# Altium PCB LF_v5_HM10_Conn.PcbDoc
Units mil, origin at the board's own origin, x right, y up, seen from the top; angles counter-clockwise.
Board outline 405.51 x 688.98 mil, 2 copper layers (Top Layer, Bottom Layer), stack 61.855 mil thick; 2 components, 4 nets, 28 pads, 0 vias.
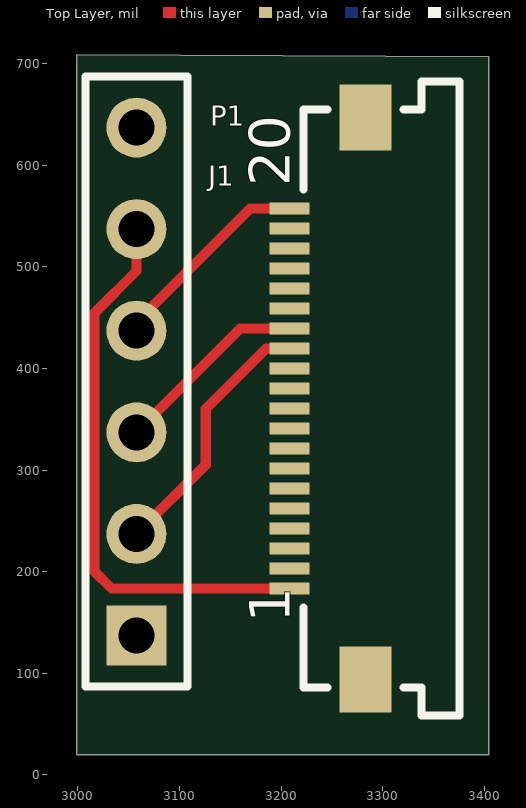
[diagram p0: Top Layer view]
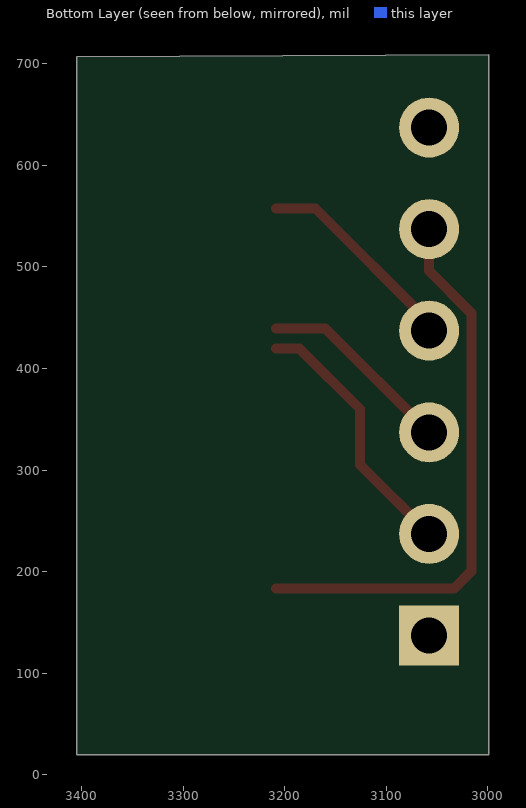
[diagram p1: Bottom Layer view, seen from below]

## Layer stack, top to bottom
Top Solder: solder mask 0.4, Solder Resist, Dk 3.5
Top Layer: signal copper 1.4
Dielectric1: core 59.0551, FR-4, Dk 4.8
Bottom Layer: signal copper 1.4
Bottom Solder: solder mask 0.4, Solder Resist, Dk 3.5

## Board outline
2999.02,19.68 2999.02,708.66 3404.53,706.69 3404.53,19.68

## Design rules (kind name [scope] priority, off if disabled: settings)
Clearance VIA-PAD [IsVIA vs IsPAD] p1: gap=6 ignorepadtopadclearanceinfootprint=FALSE except(0: Arc-Hole Track-Hole SMDPad-Hole THPad-Hole Via-Hole Fill-Hole Poly-Hole Region-Hole Text-Hole)
Clearance Clearance_REF [HasFootprint('Designator_blacking') or HasFootprint('Designator')] p2: gap=8 ignorepadtopadclearanceinfootprint=FALSE except(0: Arc-Hole Track-Hole SMDPad-Hole THPad-Hole Via-Hole Fill-Hole Poly-Hole Region-Hole Text-Hole)
Clearance Clearance_REF60 [HasFootprint('Designator_60_blacking') or HasFootprint('Designator_60')] p3: gap=15 ignorepadtopadclearanceinfootprint=FALSE except(0: Arc-Hole Track-Hole SMDPad-Hole THPad-Hole Via-Hole Fill-Hole Poly-Hole Region-Hole Text-Hole)
Clearance Clearance_28mil [HasFootprint('SFT01')] p4: gap=28 ignorepadtopadclearanceinfootprint=FALSE except(0: Arc-Hole Track-Hole SMDPad-Hole THPad-Hole Via-Hole Fill-Hole Poly-Hole Region-Hole Text-Hole)
Clearance Clearance_26mil [HasFootprint('SW-2') or HasFootprint('SW-4') or HasFootprint('SW-6') or HasFootprint('SW-8')] p5: gap=26 ignorepadtopadclearanceinfootprint=FALSE except(0: Arc-Hole Track-Hole SMDPad-Hole THPad-Hole Via-Hole Fill-Hole Poly-Hole Region-Hole Text-Hole)
Clearance Clearance_20mil [HasFootprint('NXW-02SMD') or HasFootprint('NXW-03SMD') or HasFootprint('NXW-04SMD') or HasFootprint('NXW-05SMD') or HasFootprint('NXW-06SMD') or HasFootprint('NXW-08SMD') or HasFootprint('NXW-10SMD') or HasFootprint('NXW-12SMD') or HasFootprint('GK2X5D_SMD_(PBMTD10S)')or HasFootprint('WE-PD2SA')   or HasFootprint('LK2X10E_SMD_(BHT20S)')] p6: gap=20 ignorepadtopadclearanceinfootprint=FALSE except(0: Arc-Hole Track-Hole SMDPad-Hole THPad-Hole Via-Hole Fill-Hole Poly-Hole Region-Hole Text-Hole)
Clearance Clearance_7.68mil [HasFootprint('TQFP64') vs IsPad] p7: gap=7.68 ignorepadtopadclearanceinfootprint=FALSE except(0: Arc-Hole Track-Hole SMDPad-Hole THPad-Hole Via-Hole Fill-Hole Poly-Hole Region-Hole Text-Hole)
Clearance InPolygon [InPolygon] p8: gap=15 ignorepadtopadclearanceinfootprint=FALSE except(0: Arc-Hole Track-Hole SMDPad-Hole THPad-Hole Via-Hole Fill-Hole Poly-Hole Region-Hole Text-Hole)
Clearance Keep-Out [OnLayer('Keep-Out Layer')] p9: gap=16 ignorepadtopadclearanceinfootprint=FALSE except(0: Arc-Hole Track-Hole SMDPad-Hole THPad-Hole Via-Hole Fill-Hole Poly-Hole Region-Hole Text-Hole)
Clearance RS-ZAS [InNetClass('RS_IBIS') vs InNetClass('ZAS')] p10: gap=70 ignorepadtopadclearanceinfootprint=FALSE except(0: Arc-Hole Track-Hole SMDPad-Hole THPad-Hole Via-Hole Fill-Hole Poly-Hole Region-Hole Text-Hole)
Clearance ON_GND-VT [InNet('ON_GND') vs InNet('VT')] p11: gap=70 ignorepadtopadclearanceinfootprint=FALSE except(0: Arc-Hole Track-Hole SMDPad-Hole THPad-Hole Via-Hole Fill-Hole Poly-Hole Region-Hole Text-Hole)
Clearance VT_Zasilanie [InNet('VT') vs InNetClass('ZAS')] p12: gap=70 ignorepadtopadclearanceinfootprint=FALSE except(0: Arc-Hole Track-Hole SMDPad-Hole THPad-Hole Via-Hole Fill-Hole Poly-Hole Region-Hole Text-Hole)
Clearance GND-VT [InNet('VT') vs InNet('GND')] p13: gap=70 ignorepadtopadclearanceinfootprint=FALSE except(0: Arc-Hole Track-Hole SMDPad-Hole THPad-Hole Via-Hole Fill-Hole Poly-Hole Region-Hole Text-Hole)
Clearance GND_ETH_WTÓRNA [InNetClass('ETH_WTÓRNA') vs (InNet('GND') AND InPolygon)] p14: gap=59.06 ignorepadtopadclearanceinfootprint=FALSE except(0: Arc-Hole Track-Hole SMDPad-Hole THPad-Hole Via-Hole Fill-Hole Poly-Hole Region-Hole Text-Hole)
Clearance GNT_BOTTOM [InNetClass('RS_IBIS') vs InNetClass('GND_ZAS-ON_GND')] p15: gap=70 ignorepadtopadclearanceinfootprint=FALSE except(0: Arc-Hole Track-Hole SMDPad-Hole THPad-Hole Via-Hole Fill-Hole Poly-Hole Region-Hole Text-Hole)
Clearance ON_GND-GND [InNet('ON_GND') vs InNet('GND')] p16: gap=70 ignorepadtopadclearanceinfootprint=FALSE except(0: Arc-Hole Track-Hole SMDPad-Hole THPad-Hole Via-Hole Fill-Hole Poly-Hole Region-Hole Text-Hole)
Clearance ON_GND-ALL [InNet('ON_GND')] p17: gap=15 ignorepadtopadclearanceinfootprint=FALSE except(0: Arc-Hole Track-Hole SMDPad-Hole THPad-Hole Via-Hole Fill-Hole Poly-Hole Region-Hole Text-Hole)
Clearance GND_ZAS_GND [InNet('GND_ZAS') vs InNet('GND')] p18: gap=70 ignorepadtopadclearanceinfootprint=FALSE except(0: Arc-Hole Track-Hole SMDPad-Hole THPad-Hole Via-Hole Fill-Hole Poly-Hole Region-Hole Text-Hole)
Clearance GND_ZAS-ALL [InNet('GND_ZAS')] p19: gap=15 ignorepadtopadclearanceinfootprint=FALSE except(0: Arc-Hole Track-Hole SMDPad-Hole THPad-Hole Via-Hole Fill-Hole Poly-Hole Region-Hole Text-Hole)
Clearance 3.3V-ALL [InNetClass('3.3V_L2_1')] p20: gap=20 ignorepadtopadclearanceinfootprint=FALSE except(0: Arc-Hole Track-Hole SMDPad-Hole THPad-Hole Via-Hole Fill-Hole Poly-Hole Region-Hole Text-Hole)
Clearance Clearance_1 [isvia vs isvia] p21: gap=12 ignorepadtopadclearanceinfootprint=FALSE except(0: Arc-Hole Track-Hole SMDPad-Hole THPad-Hole Via-Hole Fill-Hole Poly-Hole Region-Hole Text-Hole)
Clearance "raster 0.5mm" [(InPadClass('Pady 0.5mm')) vs IsTrack  Or IsPad] p22: gap=7.6 ignorepadtopadclearanceinfootprint=FALSE except(0: Arc-Hole Track-Hole SMDPad-Hole THPad-Hole Via-Hole Fill-Hole Poly-Hole Region-Hole Text-Hole)
Clearance Clearance_2 [All] p23: gap=7 ignorepadtopadclearanceinfootprint=FALSE except(0: Arc-Hole Track-Hole SMDPad-Hole THPad-Hole Via-Hole Fill-Hole Poly-Hole Region-Hole Text-Hole)
ComponentClearance [All] p1: gap=0 collisioncheckmode=3 verticalgap=0 showdistances=FALSE
HoleSize HoleSize_Ramka [HasFootprint('hole_frame') or HasFootprint('hole_frame1')] p1: absolutevalues=TRUE maxlimit=118.11 minlimit=118.11 maxpercent=80.000 minpercent=20.000
HoleSize [All] p2: absolutevalues=TRUE maxlimit=125.98 minlimit=12 maxpercent=80.000 minpercent=20.000
MinimumSolderMaskSliver MinimumSolderMaskSliver_Ramka [HasFootprint('LOGO-05X18_so')] p1: minsoldermaskwidth=0
MinimumSolderMaskSliver MinimumSolderMaskSliver_Via-Pad [IsVia vs IsPad] p2: minsoldermaskwidth=20
MinimumSolderMaskSliver [All] p3: minsoldermaskwidth=5.5
PolygonConnect PolygonConnect_EP [HasFootprintPad( 'TO-263_T&B',2) vs OnBottomLayer or OnTopLayer] p1: connectstyle=Direct reliefconductorwidth=10 reliefentries=4 polygonreliefangle="90 Angle" airgapwidth=10
PolygonConnect PolygonConnect_VIA [ISVIA] p2: connectstyle=Direct reliefconductorwidth=10 reliefentries=4 polygonreliefangle="90 Angle" airgapwidth=10
PolygonConnect PolygonConnect_30mil [HasFootprint('CE-SMD-J80_(H7,9MM)')] p3: connectstyle=Relief reliefconductorwidth=30 reliefentries=4 polygonreliefangle="90 Angle" airgapwidth=10
PolygonConnect PolygonConnect_24mil [HasFootprint('3528-SMDB') or HasFootprint('6032-SMDC') or HasFootprint('7343-SMDD')] p4: connectstyle=Relief reliefconductorwidth=24 reliefentries=4 polygonreliefangle="90 Angle" airgapwidth=10
PolygonConnect PolygonConnect_20mil [HasFootprint('0805R') or HasFootprint('0805C')or HasFootprint('1206R') or HasFootprint('1206C')] p5: connectstyle=Relief reliefconductorwidth=20 reliefentries=4 polygonreliefangle="90 Angle" airgapwidth=10
PolygonConnect PolygonConnect_16mil [HasFootprint('CF2040_V_(ZIF40-0,5MM)')] p6: connectstyle=Relief reliefconductorwidth=16 reliefentries=4 polygonreliefangle="90 Angle" airgapwidth=10
PolygonConnect PolygonConnect_14mil [HasFootprint('SOODIM-200_(TYCO,CONCRAFT 2,5V)') or HasFootprint('SOODIM-200_(TYCO,CONCRAFT 2,5V) - COLIBRI') or HasFootprint('TSSOP24') or HasFootprint('TSSOP20') or HasFootprint('TSSOP18') or HasFootprint('TSSOP16') or HasFootprint('TSSOP14') or HasFootprint('SSOP24-150-0.64') or HasFootprint('SOT-323-5')] p7: connectstyle=Relief reliefconductorwidth=14 reliefentries=4 polygonreliefangle="90 Angle" airgapwidth=10
PolygonConnect PolygonConnect_12mil [HasFootprint('CF2014_D_(ZIF14-0,5MM)') or HasFootprint('CF2040_U_(ODWROTNA NUMERACJA)') or HasFootprint('TQFP144') or HasFootprint('TQFP80') or HasFootprint('TQFP64') or HasFootprint('TQFP48') or HasFootprint('0603C') or HasFootprint('0603R') or HasFootprint('SOT-23-3') or HasFootprint('4D03')or HasFootprint('QFN16-0.65_(H1,6MM)')or HasFootprint('PLCC2') or HasFootprint('PLCC2-S')or HasFootprint('SFH5711')] p8: connectstyle=Relief reliefconductorwidth=12 reliefentries=4 polygonreliefangle="90 Angle" airgapwidth=10
PolygonConnect PolygonConnect_11mil [HasFootprint('QFN20_B&T') or HasFootprint('QFN24_B&T') or HasFootprint('QFN32_31_B&T') or HasFootprint('QFN32_34_B&T') or HasFootprint('QFN36_30x40_LT3958_B&T') or HasFootprint('QFN36_37_B&T') or HasFootprint('QFN36_44_B&T') or HasFootprint('QFN40_41_B&T') or HasFootprint('QFN40_44_B&T_1')or HasFootprint('QFN56_59_B&T')] p9: connectstyle=Relief reliefconductorwidth=11 reliefentries=4 polygonreliefangle="90 Angle" airgapwidth=10
PolygonConnect PolygonConnect_13mil [HasFootprint('QFN12-0.80_21_B&T') or HasFootprint('QFN16-0.65_21_B&T')] p10: connectstyle=Relief reliefconductorwidth=13 reliefentries=4 polygonreliefangle="90 Angle" airgapwidth=10
PolygonConnect PolygonConnect_10mil [HasFootprint('D0603') or HasFootprint('0402') or HasFootprint('D0603R') or HasFootprint('D0603G') or HasFootprint('D0603B') or HasFootprint('D0603Y') or HasFootprint('0402R') or HasFootprint('0402C')] p11: connectstyle=Relief reliefconductorwidth=10 reliefentries=4 polygonreliefangle="90 Angle" airgapwidth=10
PolygonConnect PolygonConnect_NoConnect [HasFootprint('SFT01') or HasFootprint('SW-2') or HasFootprint('SW-4') or HasFootprint('SW-6') or HasFootprint('SW-8') or HasFootprint('SOT-223') or HasFootprint('SOT-223_')] p12: connectstyle=NoConnect reliefconductorwidth=15 reliefentries=4 polygonreliefangle="90 Angle" airgapwidth=10
PolygonConnect PolygonConnect_1 [ispad] p13: connectstyle=Relief reliefconductorwidth=20 reliefentries=4 polygonreliefangle="90 Angle" airgapwidth=10
PolygonConnect [All] p14: connectstyle=Relief reliefconductorwidth=20 reliefentries=4 polygonreliefangle="90 Angle" airgapwidth=10
RoomDefinition Blutfu [InComponentClass('Blutfu')] p1: confinementstyle=ConfineOut formatcopy=TRUE lockcomponents=FALSE outline 3090.35,-4213.58 5090.35,-4213.58 5090.35,-3213.58 3090.35,-3213.58
RoutingVias [All] p1: holewidth=20 width=40 viastyle="Through Hole" minholewidth=12 minwidth=24 maxholewidth=39.37 maxwidth=60
SMDToCorner [All] p1: distance=100
SilkToSilkClearance SilkToSilkClearance_JMP2_SMD [HasFootprint('JMP2_SMD')] p1: silktosilkclearance=0
SilkToSilkClearance [All] p2: silktosilkclearance=1
SilkToSolderMaskClearance SilkscreenOverComponentPads [IsPad] p1: minsilkscreentomaskgap=6 clearancetoexposedcopper=TRUE
SolderMaskExpansion [All] p1: expansion=1 istentingtop=FALSE
Width Width_Ramka [HasFootprint('hole_frame') or HasFootprint('hole_frame1') or HasFootprint('Designator_blacking_B&T1') or HasFootprint('Designator_blacking_B&T2') or HasFootprint('Designator_blacking_B&T3') or HasFootprint('Designator_blacking_B&T4') or HasFootprint('Designator_blacking_B&T5')] p1: maxlimit=102.36 minlimit=10 preferedwidth=10
Width [All] p2: maxlimit=100 minlimit=8 preferedwidth=10
25 further rules are at their usual default settings.

## Components (designator, comment, footprint, x,y, rotation, side; value= is the part's Value field where it differs from the comment)
J1 "ADAPTER DO BLE" 687120183722 3298.9,370.39 r90 top
P1 "Header 6" HDR1X6 3057.75,137.11 r90 top

## Footprints (in the part's own frame and the unit in brackets; to place one, negate y for a bottom-side part, rotate by r counter-clockwise, add the part's x,y. Pads: shape width x height; smd on the part's side, far side on the other; paste and mask are expansions set on the pad)
687120183722 [mm] "ZIF Connectors, Horizontal, Bottom Contact Low Profile, pitch 0.5mm, 20p"
  rect 0.3x1 smd: 1(-4.75,2.3) 2(-4.25,2.3) 3(-3.75,2.3) 4(-3.25,2.3) 5(-2.75,2.3) 6(-2.25,2.3) 7(-1.75,2.3) 8(-1.25,2.3) 9(-0.75,2.3) 10(-0.25,2.3) 11(0.25,2.3) 12(0.75,2.3) 13(1.25,2.3) 14(1.75,2.3) 15(2.25,2.3) 16(2.75,2.3) 17(3.25,2.3) 18(3.75,2.3) 19(4.25,2.3) 20(4.75,2.3)
  rect 1.65x1.3 smd: MP1(-7.025,0.4) MP2(7.025,0.4)
  silkscreen extent -7.92,-1.95 7.93,1.95, body extent -7.85,-1.9 7.85,2.35, height 1.28
HDR1X6 [mm] "Connector; Header; 6 Position"
  rect 1.5x1.5 hole 0.9: 1(0,0)
  round 1.5 hole 0.9: 2(2.54,0) 3(5.08,0) 4(7.62,0) 5(10.16,0) 6(12.7,0)
  silkscreen extent -1.27,-1.27 13.97,1.27

## Part data
J1: library part CMP-1502-01579-1, "SMT ZIF Connectors Low Profile WR-FPC, Horizontal, Bottom Contact, pitch 0.5 mm, 20 pins", Contact Resistance=30mOhm, Manufacturer="Wurth Elektronik", Operating Temperature=-25to85degC, Package Reference=687120183722, Rated Current=0.4A, Withstanding Voltage=250VAC, Working Voltage=50VAC, Contact Design=BottomContact, Datasheet URL=https://katalog.we-online.de/em/datasheet/687120183722.pdf, Manufacturer URL=http://www.we-online.de, Mounting Technology=SMT, Orientation=Horizontal, Packaging=TapeandReel, Part Number=687120183722, Pin Number=20, Pitch=0.5mm, Publisher=WurthElektronik
P1: "Header, 6-Pin", LatestRevisionDate=17-Jul-2002, LatestRevisionNote="Re-released for DXP Platform.", Publisher="Altium Limited"

## Nets (pads, with @x,y where several pads share a name; then routed paths per layer and width w, separated by ;. In a path a pad name is that pad's centre, name@x,y a point inside that pad or via, vN(x,y) a via of type N, cw(c..) or ccw(c..) an arc to the next point about the centre after c; other vN are vias at no path point)
GND_BLE: J1.20 P1.4 | length 205.4
  Top Layer w10: P1.4 3057.75,445.54 3169.61,557.4 J1.20
USART3_BLE_RX: J1.14 P1.3 | length 192.9
  Top Layer w10: P1.3 3159.92,439.29 J1.14
USART3_BLE_TX: J1.13 P1.2 | length 258.3
  Top Layer w10: P1.2 3125.85,305.22 3125.85,359.98 3185.47,419.61 J1.13
VCC_BLE: J1.1 P1.5 | length 553.1
  Top Layer w10: P1.5 3057.75,495.84 3016.22,454.32 3016.22,200.32 3033.15,183.39 J1.1
pads on no net: J1.2 J1.3 J1.4 J1.5 J1.6 J1.7 J1.8 J1.9 J1.10 J1.11 J1.12 J1.15 J1.16 J1.17 J1.18 J1.19 J1.MP1 J1.MP2 P1.1 P1.6

## Silkscreen, mask and mechanical layers (free items; w line width, h text height)
Milling:
  the board outline again, w3.94

## Text inside footprints (layer, text, board x,y; h text height)
J1: Top Overlay "1" at 3208.35,149.92 h40 r90; Top Overlay "20" at 3208.35,579.06 h40 r90